# Altium PCB STM32WB55.PcbDoc
Units mm, origin at the board's own origin, x right, y up, seen from the top; angles counter-clockwise.
Board outline 51.82 x 28.33 mm, 4 copper layers (L1, L2, L3, L4), stack 1.586 mm thick; 54 components, 34 nets, 244 pads, 150 vias.
Unrouted connection lines stored in the file: 1.
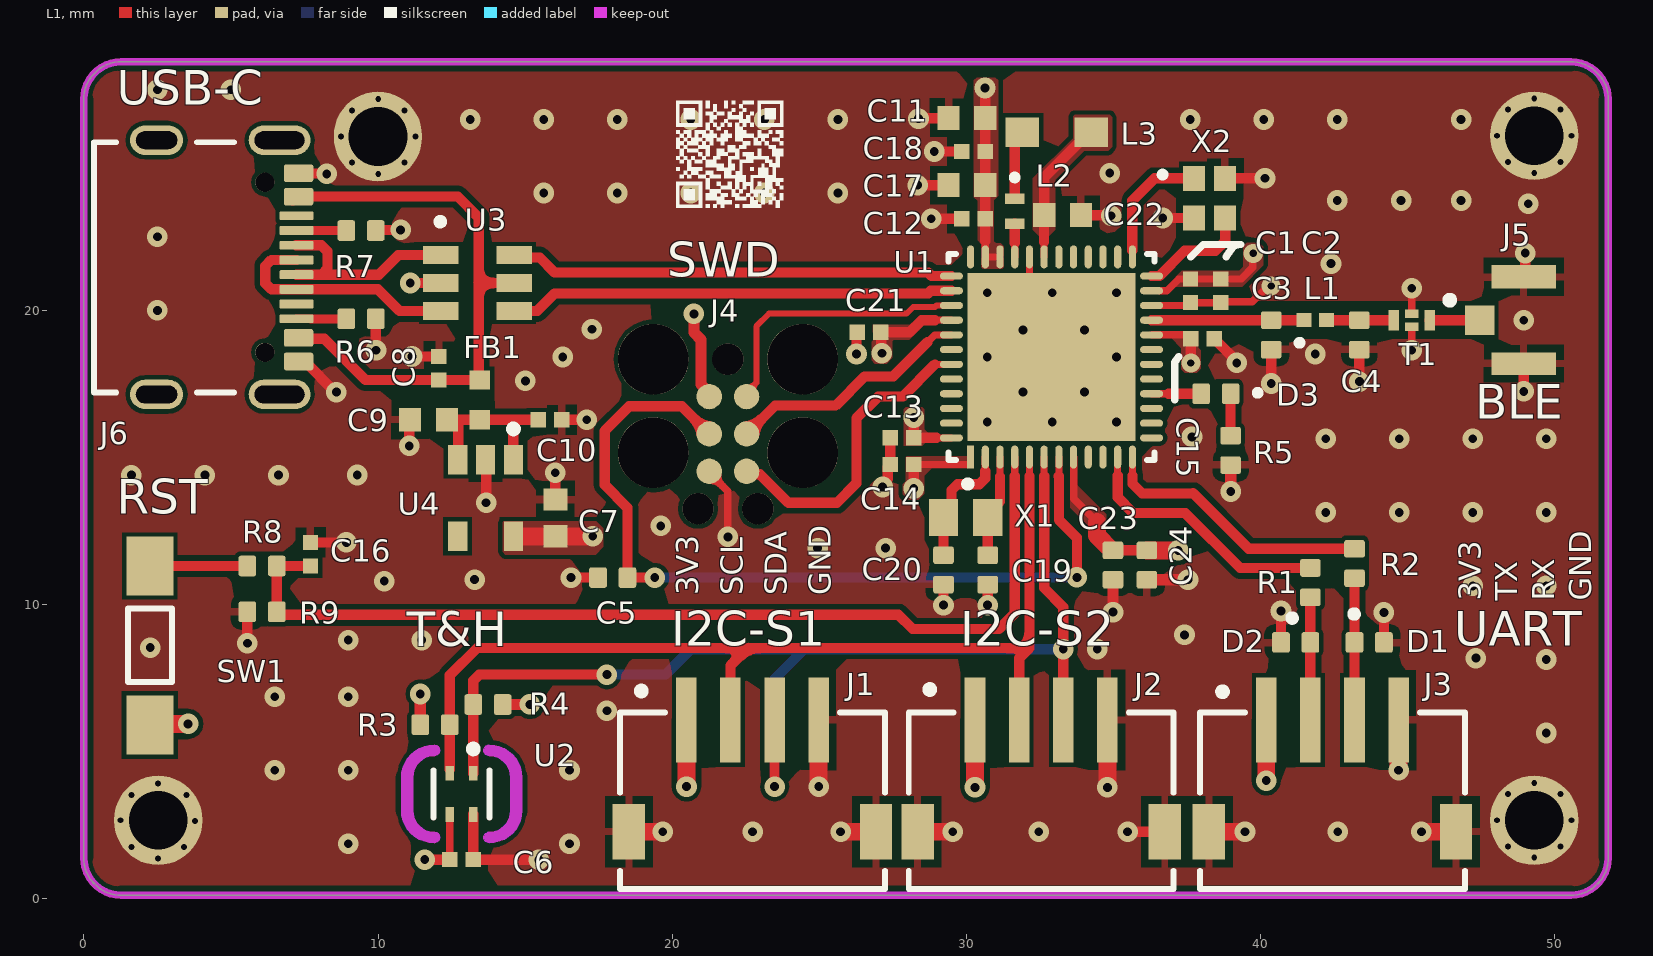
[diagram p0: L1 view]
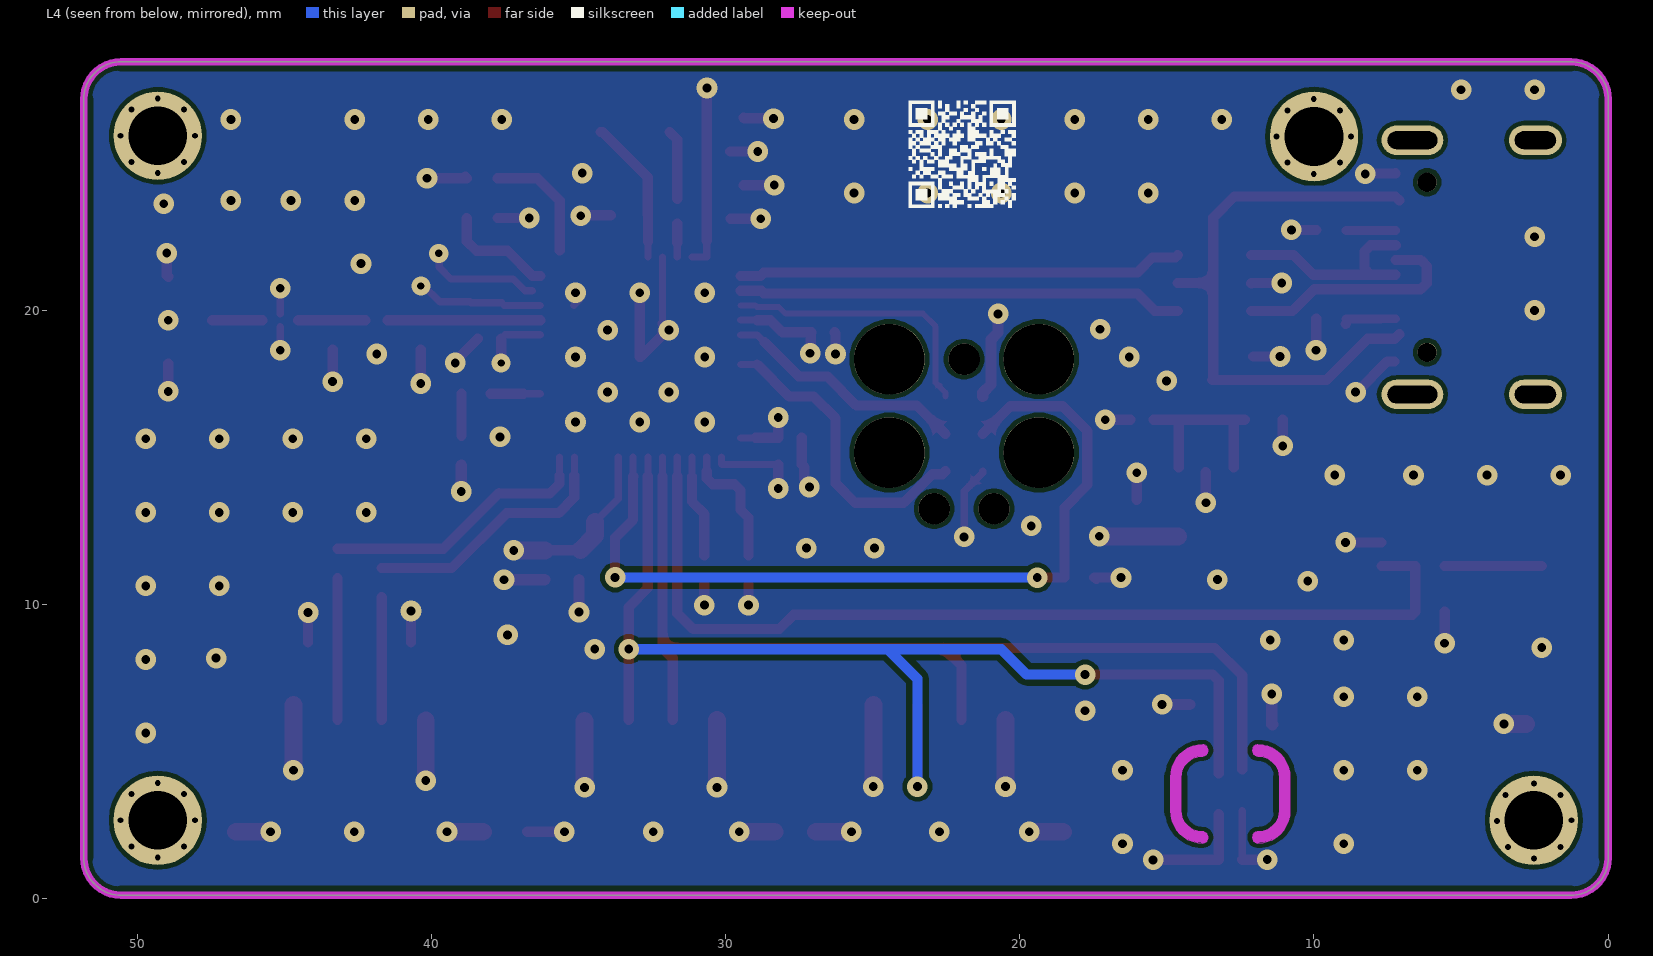
[diagram p1: L4 view, seen from below]
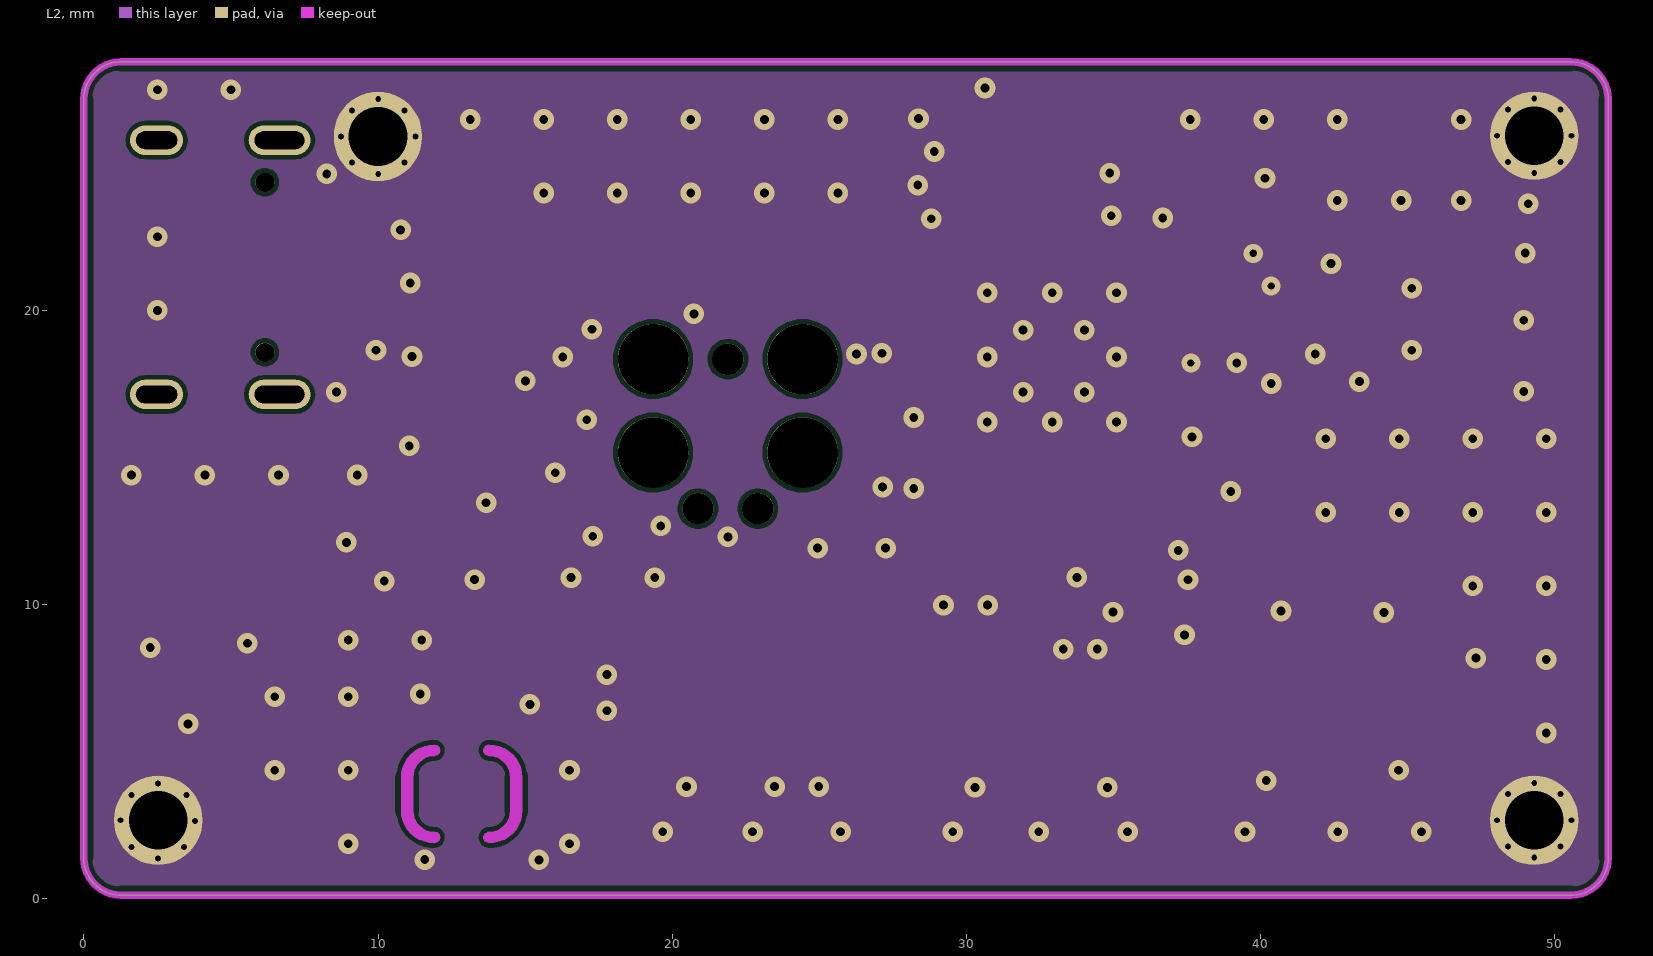
[diagram p2: L2]
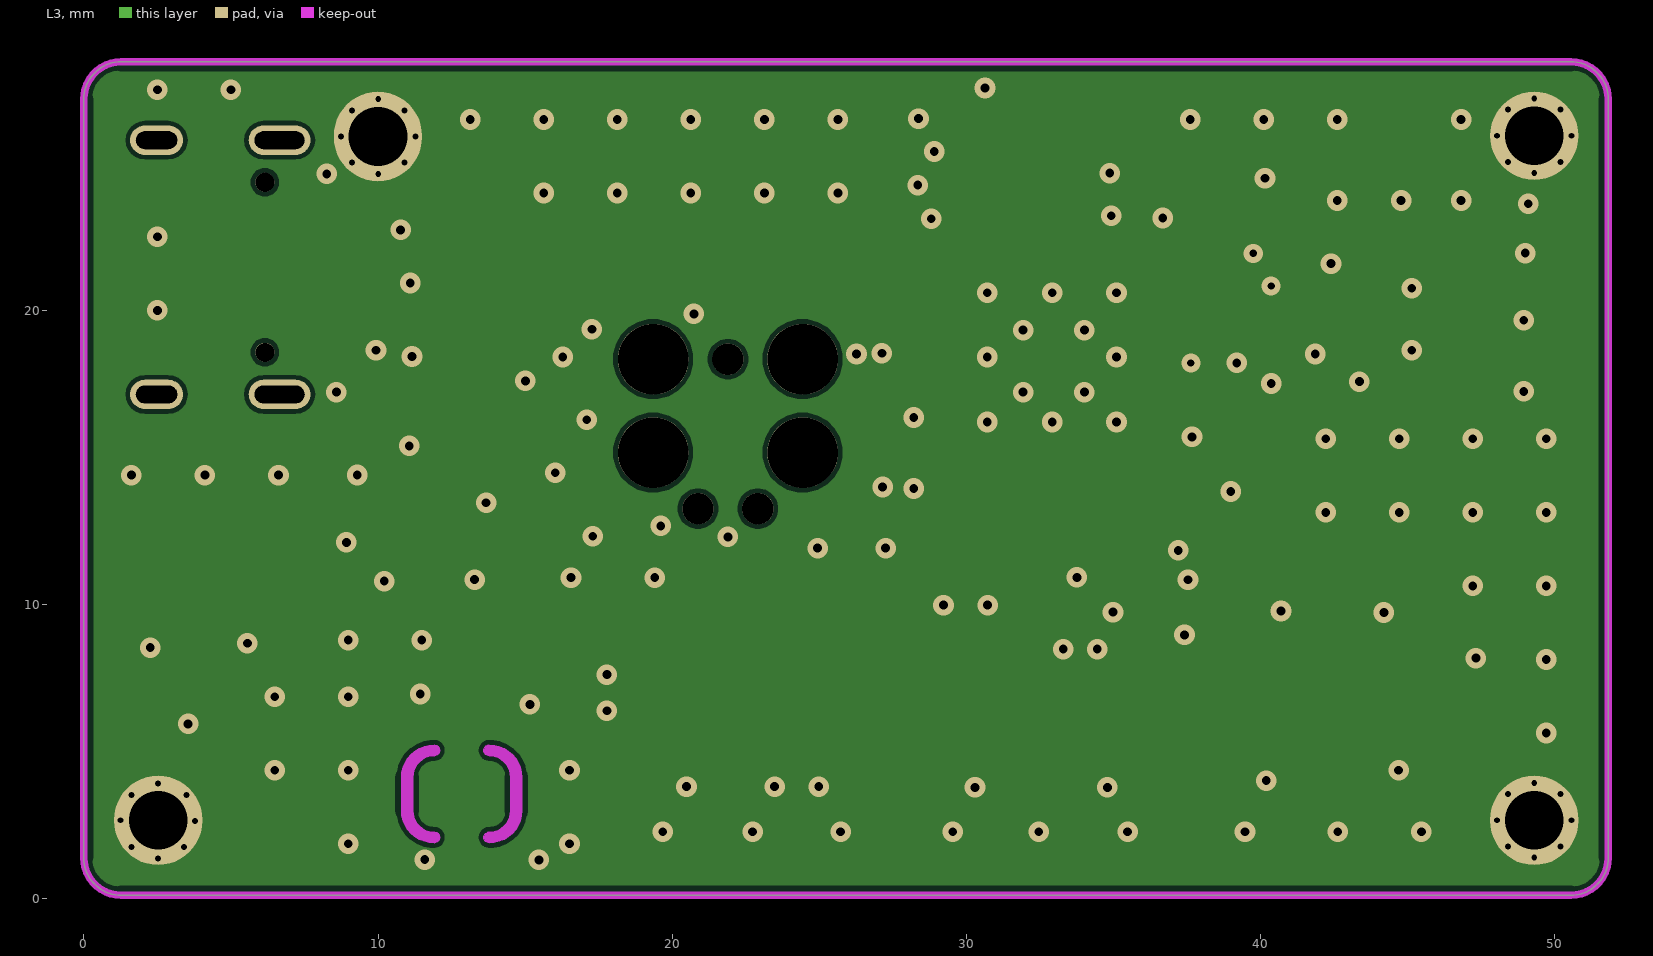
[diagram p3: L3]
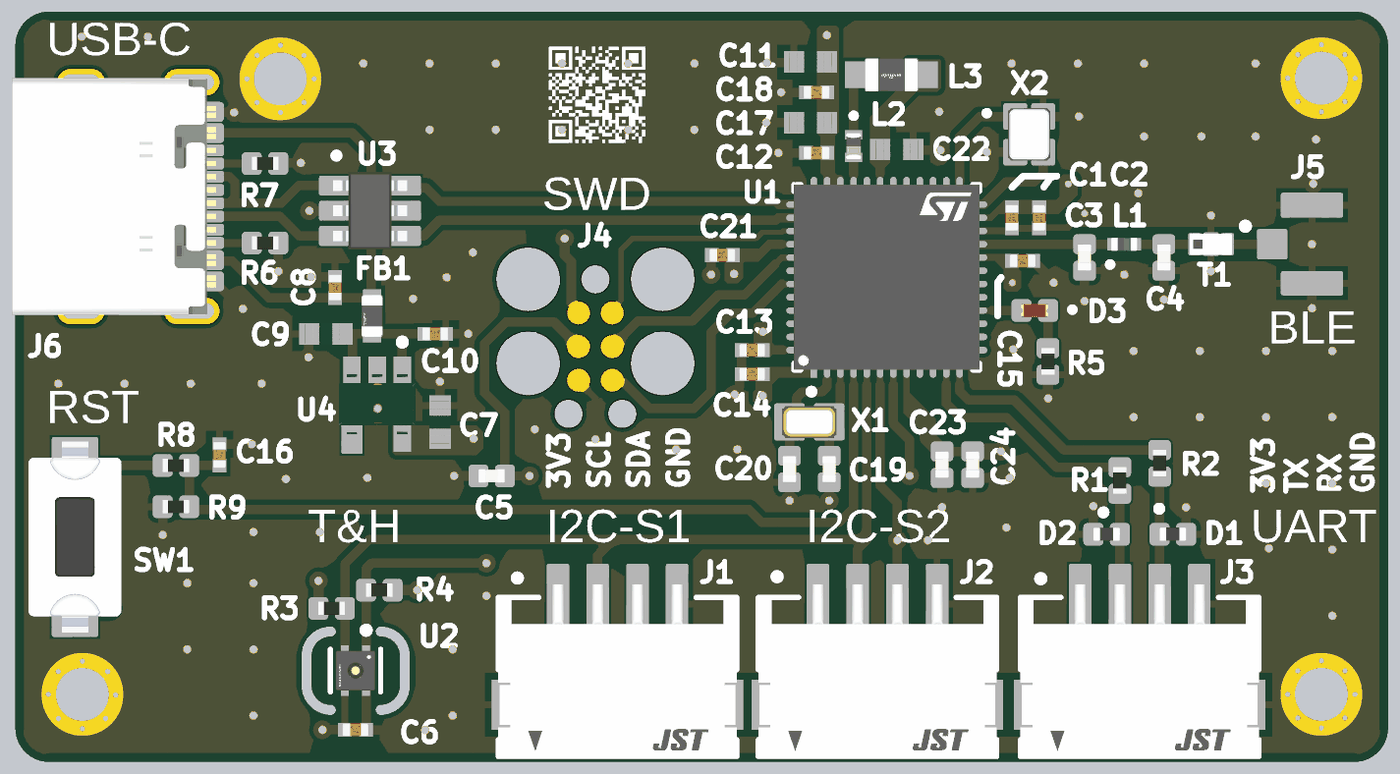
[diagram p4: 3D render of the assembled board from above, using the file's embedded part models]

## Layer stack, top to bottom
Top Solder: solder mask 0.0254, Solder Resist, Dk 3.5
L1: signal copper 0.035
PP1-7628: prepreg 0.2104, PP-022, Dk 4.5
L2: signal copper 0.0152
C-RF4: dielectric 1.065, FR-4, Dk 4.6
L3: signal copper 0.0152
PP2-7628: prepreg 0.2104, PP-022, Dk 4.5
L4: signal copper 0.035
Bottom Solder: solder mask 0.0254, Solder Resist, Dk 3.5

## Board outline
1.27,0.118 cw(c1.27,1.388) 0,1.388 0,27.178 cw(c1.27,27.178) 1.27,28.448 50.546,28.448 cw(c50.546,27.178) 51.816,27.178 51.816,1.388 cw(c50.546,1.388) 50.546,0.118
cut-out: 13.786,1.892 cw(c13.786,2.083) 13.786,2.274 ccw(c13.786,2.997) 14.509,2.997 14.509,4.127 ccw(c13.786,4.127) 13.786,4.85 cw(c13.786,5.041) 13.786,5.232 cw(c13.786,4.127) 14.891,4.128 14.891,2.997 cw(c13.786,2.997)
cut-out: 10.801,2.997 10.801,4.128 cw(c11.906,4.127) 11.906,5.232 cw(c11.906,5.041) 12.097,5.041 cw(c11.906,5.041) 11.906,4.85 ccw(c11.906,4.127) 11.182,4.127 11.182,2.997 ccw(c11.906,2.997) 11.906,2.274 cw(c11.906,2.083) 12.097,2.083 cw(c11.906,2.083) 11.906,1.892 cw(c11.906,2.997)

## Design rules (kind name [scope] priority, off if disabled: settings)
Clearance [All] p1: gap=0.15 ignorepadtopadclearanceinfootprint=FALSE except(0.2: Track-Poly)
DiffPairsRouting [All] p1: maxlimit=0.36 minlimit=0.127 mostfreqgap=0.36 toplayer_mingap=0.36 toplayer_minwidth=0.35 toplayer_maxwidth=0.35 toplayer_prefwidth=0.35 bottomlayer_mingap=0.36 bottomlayer_minwidth=0.35 bottomlayer_maxwidth=0.35 bottomlayer_prefwidth=0.35 impedanceprofiledriven=TRUE impedanceprofileid={4837A5BA-187C-47B3-9FB3-3A0B7BE3B15D} impedanceprofilevalue=90.000000 maxuncoupledlength=12.7
HoleToHoleClearance [All] p1: gap=0.15 allowstackedmicrovias=TRUE
MinimumSolderMaskSliver [All] p1: minsoldermaskwidth=0.1
PasteMaskExpansion [All] p1: expansion=0.076
PlaneConnect [All] p1: pad.planeconnectstyle=Direct pad.reliefexpansion=0.508 pad.reliefentries=4 pad.reliefconductorwidth=0.254 pad.reliefairgap=0.254 via.planeconnectstyle=Relief via.reliefexpansion=0.508 via.reliefentries=4 via.reliefconductorwidth=0.254 via.reliefairgap=0.254
PolygonConnect [All] p1: thpad.connectstyle=Relief thpad.reliefconductorwidth=0.254 thpad.reliefentries=4 thpad.polygonreliefangle="90 Angle" thpad.airgapwidth=0.254 smdpad.connectstyle=Relief smdpad.reliefconductorwidth=0.254 smdpad.reliefentries=4 smdpad.polygonreliefangle="90 Angle" smdpad.airgapwidth=0.254 via.connectstyle=Direct via.reliefconductorwidth=0.254 via.reliefentries=4 via.polygonreliefangle="90 Angle" via.airgapwidth=0.254
RoutingVias [All] p1: holewidth=0.3 width=0.7 viastyle="Through Hole" minholewidth=0.25 minwidth=0.65 maxholewidth=0.3 maxwidth=0.7
SolderMaskExpansion [All] p1: expansion=0.038 istentingtop=FALSE
Width Power [InNetClass('USB_Power')] p1: maxlimit=2.54 minlimit=0.2 preferedwidth=0.61 minimp=50.000000 maximp=50.000000 favimp=50.000000
Width [All] p2: maxlimit=0.35 minlimit=0.1 preferedwidth=0.35 midlayer1_minwidth=0.27 midlayer1_maxwidth=0.27 midlayer1_prefwidth=0.27 midlayer2_minwidth=0.27 midlayer2_maxwidth=0.27 midlayer2_prefwidth=0.27 bottomlayer_minwidth=0.35 impedanceprofiledriven=TRUE impedanceprofileid={0980600F-B7DE-4A01-A419-43350739EBA9} impedanceprofilevalue=50.000000 minimp=50.000000 maximp=50.000000 favimp=50.000000
25 further rules are at their usual default settings.

## Classes and differential pairs
net class USB_Power: 3V3 GND VDDUSB
differential pair DATA: +DATA_P -DATA_N

## Components (designator, comment, footprint, x,y, rotation, side; value= is the part's Value field where it differs from the comment)
C1 "C0402C104K8RAC" FP-C0402-BB-MFG 37.617,20.665 r270 top value=100nF
C2 "C0402C104K8RAC" FP-C0402-BB-MFG 38.648,20.665 r270 top value=100nF
C3 "GRM1555C2AR80BA01D" CAP_0402#1 40.361,19.165 r90 top
C4 "GRM1555C1HR30WA01D" CAP_0402#1 43.358,19.165 r90 top
C5 "C0402" CAP_0402#1 17.979,10.917 r0 top
C6 "C0402C104K8RAC" FP-C0402-BB-MFG 12.839,1.33 r0 top value=100nF
C7 "CL10A475KP8NNND" FP-CL10-IPC_C 16.027,12.946 r90 top
C8 "C0402C104K8RAC" FP-C0402-BB-MFG 12.065,18.031 r90 top value=100nF
C9 "CL10A475KP8NNND" FP-CL10-IPC_C 11.717,16.281 r180 top
C10 "C0402C104K8RAC" FP-C0402-BB-MFG 15.848,16.281 r0 top value=100nF
C11 "CL10A475KP8NNND" FP-CL10-IPC_C 30.016,26.543 r180 top
C12 "C0402C104K8RAC" FP-C0402-BB-MFG 30.243,23.114 r180 top value=100nF
C13 "C0402C104K8RAC" FP-C0402-BB-MFG 27.813,15.665 r180 top value=100nF
C14 "C0402C104K8RAC" FP-C0402-BB-MFG 27.813,14.76 r180 top value=100nF
C15 "C0402C104K8RAC" FP-C0402-BB-MFG 38.024,19.038 r0 top value=100nF
C16 "C0402C104K8RAC" FP-C0402-BB-MFG 7.706,11.711 r90 top value=100nF
C17 "CL10A475KP8NNND" FP-CL10-IPC_C 30.016,24.257 r180 top
C18 "C0402C104K8RAC" FP-C0402-BB-MFG 30.243,25.4 r180 top value=100nF
C19 "C0402" CAP_0402#2 30.722,11.176 r90 top
C20 "C0402" CAP_0402#2 29.222,11.176 r90 top
C21 "C0402C104K8RAC" FP-C0402-BB-MFG 26.689,19.253 r180 top value=100nF
C22 "CL10A475KP8NNND" FP-CL10-IPC_C 33.27,23.241 r0 top
C23 "C0402" CAP_0402#1 34.982,11.342 r90 top
C24 "C0402" CAP_0402#1 36.137,11.342 r90 top
D1 "D_TVS_0402" D_0402 43.693,8.712 r180 top locked
D2 "D_TVS_0402" D_0402 41.193,8.712 r0 top
D3 "RED" LED_0402_RED 38.481,17.165 r0 top
FB1 "BLM18EG101TN1D" FP-BLM18-0_15-t0_5-MFG 13.463,16.956 r270 top
J1 "S4B-ZR-SM4A-TF(LF)(SN)" FP-S4B-ZR-SM4A-TF_LF_SN-MFG 22.729,3.327 r180 top
J2 "S4B-ZR-SM4A-TF(LF)(SN)" FP-S4B-ZR-SM4A-TF_LF_SN-MFG 32.543,3.327 r180 top
J3 "S4B-ZR-SM4A-TF(LF)(SN)" FP-S4B-ZR-SM4A-TF_LF_SN-MFG 42.443,3.327 r180 top
J4 "TC2030" TC2030-FP 21.895,15.799 r270 top
J5 "73412-0110" MOLX-73412-0110_V 48.946,19.665 r270 top
J6 "USB4105-GF-A-060" USB4105-GF-A-060 4.851,21.463 r270 top
L1 "LQG15HS2N7S02D" FP-LQG15HH_02-IPC_C 41.859,19.665 r0 top
L2 "LQG15WZ10NJ02D" FP-LQG15WH_02-MFG 31.643,23.368 r270 top
L3 "LQM21FN100M70L" FP-LQM21FN_70-MFG 33.072,26.06 r180 top
R1 "220ohm" RES_0402#1 41.693,10.744 r270 top
R2 "220ohm" RES_0402#1 43.193,11.394 r270 top
R3 "10K" RES_0402#2 11.939,5.917 r180 top
R4 "10K" RES_0402#2 13.739,6.602 r0 top
R5 "220ohm" RES_0402#1 38.981,15.24 r270 top
R6 "R0402" RES_0402#1 9.423,19.71 r0 top
R7 "5K1" RES_0402#1 9.423,22.713 r0 top
R8 "R0402" RES_0402#1 6.059,11.311 r0 top
R9 "5k1" RES_0402#1 6.059,9.754 r0 top
SW1 "DTSM-3" DTSM-3 2.247,8.611 r270 top
T1 "DLF162500LT-5028A1" DLF162500LT5028A1 45.136,19.665 r0 top
U1 "STM32WB55CGU6" FP-STM32WB55CGU6-IPC_B 32.893,18.415 r90 top
U2 "SHT40-AD1B-R2" FP-SHT40-AD1B-R2-MFG 12.839,3.566 r270 top
U3 "USBLC6-2SC6" SOT95P280X145-6N 13.386,20.93 r0 top
U4 "MIC5504-3.3YM5-TR" FP-SOT23-5LD-PL-1-MFG 13.655,13.619 r270 top
X1 "NX2012SA-32.768K-STD-MUB-1" XTAL_NX2012SA-32.768K-STD-MUB-1 29.972,12.954 r180 top value="32.768 kHz"
X2 "NX2016SA-32MHZ-EXS00A-CS10820" OSC_NX2016SA-24MHZ-EXS00A-CS10820 38.269,23.814 r0 top

## Footprints (in the part's own frame and the unit in brackets; to place one, negate y for a bottom-side part, rotate by r counter-clockwise, add the part's x,y. Pads: shape width x height; smd on the part's side, far side on the other; paste and mask are expansions set on the pad)
CAP_0402#1 [mm]
  rrect25% 0.6x0.7 smd: 1(-0.5,0) 2(0.5,0)
  body extent -0.5,-0.26 0.5,0.26, height 0.37
CAP_0402#2 [mm]
  rrect25% 0.6x0.7 smd mask+0.025: 1(-0.5,0) 2(0.5,0)
  body extent -0.5,-0.26 0.5,0.26, height 0.37
D_0402 [mm]
  rrect25% 0.6x0.7 smd: A(-0.5,0) K(0.5,0)
  body extent -0.5,-0.25 0.5,0.25, height 0.51
DLF162500LT5028A1 [mm]
  rect 0.35x0.7 smd mask+0.025: 1(-0.612,0) 3(0.613,0)
  rect 0.45x0.29 smd mask+0.025: 2(0,-0.227) 4(0,0.227)
  body extent -0.8,-0.4 0.8,0.4, height 0.4
DTSM-3 [mm]
  rect 2x1.6 smd: 1(-2.7,0) 2(2.7,0)
  silkscreen extent -1.25,-0.75 1.25,0.75, body extent -3.6,-1.75 3.6,1.75, height 4.96
FP-BLM18-0_15-t0_5-MFG [mm]
  rect 0.65x0.7 smd paste+0 mask+0: 1(-0.675,0) 2(0.675,0)
  body extent -1.1,-0.58 1.1,0.58, height 0.25
FP-C0402-BB-MFG [mm]
  rect 0.52x0.52 smd paste+0 mask+0: 1(-0.4,0) 2(0.4,0)
  body extent -0.8,-0.4 0.8,0.4, height 0.25
FP-CL10-IPC_C [mm]
  rect 0.758x0.812 smd paste+0 mask+0: 1(-0.627,0) 2(0.627,0)
  body extent -1.11,-0.55 1.11,0.55, height 0.25
FP-LQG15HH_02-IPC_C [mm]
  rect 0.515x0.472 smd paste+0 mask+0: 1(-0.379,0) 2(0.379,0)
  silkscreen extent -0.61,-0.84 -0.46,-0.69, body extent -0.74,-0.38 0.74,0.38, height 0.25
FP-LQG15WH_02-MFG [mm]
  rect 0.35x0.65 smd paste+0 mask+0: 1(-0.425,0) 2(0.425,0)
  silkscreen extent -1.25,-0.1 -1.05,0.1, body extent -0.7,-0.43 0.7,0.43, height 0.25
FP-LQM21FN_70-MFG [mm]
  rect 1.15x1 smd paste+0 mask+0: 1(-1.175,0) 2(1.175,0)
  body extent -1.85,-0.82 1.85,0.82, height 0.25
FP-S4B-ZR-SM4A-TF_LF_SN-MFG [mm]
  rect 0.7x2.9 smd: 1(2.25,-2.75) 2(0.75,-2.75) 3(-0.75,-2.75) 4(-2.25,-2.75)
  rect 1.1x1.9 smd paste+0 mask+0: 5(-4.2,1.05) 6(4.2,1.05)
  silkscreen extent -4.5,-3.86 4.5,3, body extent -4.85,-4.3 4.85,3.1, height 0.25
FP-SHT40-AD1B-R2-MFG [mm]
  rect 0.5x0.3 smd paste+0 mask+0: 1(-0.7,0.4) 2(-0.7,-0.4) 3(0.7,-0.4) 4(0.7,0.4)
  silkscreen extent -1.65,-0.95 0.8,0.95, body extent -1.05,-0.9 1.05,0.9, height 0.25
FP-SOT23-5LD-PL-1-MFG [mm]
  rect 1x0.66 smd paste+0 mask+0: 1(-1.3,0.95) 2(-1.3,0) 3(-1.3,-0.95) 5(1.3,0.95)
  rect 1x0.66 smd mask+0: 4(1.3,-0.95)
  silkscreen extent -2.47,0.83 -2.23,1.08, body extent -1.9,-1.6 1.9,1.6, height 0.25
FP-STM32WB55CGU6-IPC_B [mm]
  rect 0.783x0.242 smd paste+0 mask+0: 1(-3.401,2.75)
  rrect100% 0.783x0.242 smd paste+0 mask+0: 2(-3.401,2.25) 3(-3.401,1.75) 4(-3.401,1.25) 5(-3.401,0.75) 6(-3.401,0.25) 7(-3.401,-0.25) 8(-3.401,-0.75) 9(-3.401,-1.25) 10(-3.401,-1.75) 11(-3.401,-2.25) 12(-3.401,-2.75) 25(3.401,-2.75) 26(3.401,-2.25) 27(3.401,-1.75) 28(3.401,-1.25) 29(3.401,-0.75) 30(3.401,-0.25) 31(3.401,0.25) 32(3.401,0.75) 33(3.401,1.25) 34(3.401,1.75) 35(3.401,2.25) 36(3.401,2.75)
  rrect100% 0.242x0.783 smd paste+0 mask+0: 13(-2.75,-3.401) 14(-2.25,-3.401) 15(-1.75,-3.401) 16(-1.25,-3.401) 17(-0.75,-3.401) 18(-0.25,-3.401) 19(0.25,-3.401) 20(0.75,-3.401) 21(1.25,-3.401) 22(1.75,-3.401) 23(2.25,-3.401) 24(2.75,-3.401) 37(2.75,3.401) 38(2.25,3.401) 39(1.75,3.401) 40(1.25,3.401) 41(0.75,3.401) 42(0.25,3.401) 43(-0.25,3.401) 44(-0.75,3.401) 45(-1.25,3.401) 46(-1.75,3.401) 47(-2.25,3.401) 48(-2.75,3.401)
  rect 5.7x5.7 smd paste-1000 mask+0: 49(0,0)
  silkscreen extent -4.42,-3.5 3.5,3.5, body extent -4.11,-4.11 4.11,4.11, height 0.25
LED_0402_RED [mm]
  rrect25% 0.6x0.7 smd: A(-0.5,0) K(0.5,0)
  body extent -0.51,-0.25 0.51,0.25, height 0.45
MOLX-73412-0110_V [mm] "MCRF, 4-Leads, Body 2.6x2.6mm"
  rect 1x1 smd: 1(0,-1.5)
  rect 0.796x2.2 smd: 2(-1.475,0)
  rect 0.771x2.2 smd: 4(1.475,0)
  silkscreen extent -0.81,-2.64 -0.56,-2.39, body extent -1.3,-1.3 1.3,1.3, height 1.3
OSC_NX2016SA-24MHZ-EXS00A-CS10820 [mm]
  rect 0.75x0.85 smd mask+0.025: 1(-0.525,0.675) 2(-0.525,-0.675) 3(0.525,-0.675) 4(0.525,0.675)
  silkscreen extent -1.7,0.7 -1.5,0.9, body extent -0.8,-1 0.8,1, height 0.5
RES_0402#1 [mm]
  rrect25% 0.6x0.7 smd: 1(-0.5,0) 2(0.5,0)
  body extent -0.5,-0.25 0.5,0.25, height 0.3
RES_0402#2 [mm]
  rrect25% 0.6x0.7 smd mask+0.025: 1(-0.5,0) 2(0.5,0)
  body extent -0.5,-0.25 0.5,0.25, height 0.3
SOT95P280X145-6N [mm]
  rect 1.2x0.6 smd mask+0.025: 1(-1.25,0.95) 2(-1.25,0) 3(-1.25,-0.95) 4(1.25,-0.95) 5(1.25,0) 6(1.25,0.95)
  body extent -1.4,-1.46 1.4,1.46, height 1.45
TC2030-FP [mm]
  round 0.863 smd paste-0.432: 1(-1.27,-0.635) 2(-1.27,0.635) 3(0,-0.635) 4(0,0.635) 5(1.27,-0.635) 6(1.27,0.635)
  round 2.4 hole 2.4 unplated: MH(-2.54,2.54) MH(-2.54,-2.54) MH(0.635,2.54) MH(0.635,-2.54)
  round 1.067 hole 1.067 unplated: MH(-2.54,0) MH(2.54,1.016) MH(2.54,-1.016)
USB4105-GF-A-060 [mm]
  rrect25% 0.6x1 smd mask+0.025: A1B12(-3.2,2.449) A4B9(-2.4,2.449) B1A12(3.2,2.449) B4A9(2.4,2.449)
  rrect25% 0.3x1.15 smd mask+0.025: A5(-1.25,2.378) A6(-0.25,2.378) A7(0.25,2.378) A8(1.25,2.378) B5(1.75,2.378) B6(0.75,2.378) B7(-0.75,2.378) B8(-1.75,2.378)
  round 0.65 hole 0.65 unplated mask+0.05: MH(-2.89,1.303) MH(2.89,1.303)
  oval 1x2.1 hole 0.6 slot 1.7 at 90 deg: SH(-4.32,1.803) SH(4.32,1.803)
  oval 1x1.8 hole 0.6 slot 1.4 at 90 deg: SH(-4.32,-2.377) SH(4.32,-2.377)
  silkscreen extent -4.25,-4.5 4.25,0.25, body extent -4.47,-4.97 4.47,2.73, height 3.27
XTAL_NX2012SA-32.768K-STD-MUB-1 [mm]
  rect 1x1.25 smd mask+0.025: 1(-0.75,0) 2(0.75,0)
  body extent -1.02,-0.6 1.02,0.6, height 0.6

## Part data
C1 C2 C6 C8 C10 C12 C13 C14 C15 C16 C18 C21: library part CMP-03020-004693-2, "C0402 0.10 μF X7R 10.00% 10 V", Capacitance=100nF, Manufacturer=Kemet, Package=C0402-BB, Temperature="-55°C to +125°C", Temperature Characteristic=X7R, Temperature Coefficient=15%, Temperature Range High=+125°C, Temperature Range Low=-55°C, Tolerance=0.1, Voltage Rating="10 V", Automotive=No, Category=Cap, ComponentLink2Description=Datasheet, ComponentLink2URL=https://content.kemet.com/datasheets/KEM_C1002_X7R_SMD.pdf, Device Class L1="Passive Components", Device Class L2=Capacitors, Device Class L3="Ceramic Capacitors", Height=0.55mm, Ipc Land Pattern Name=CAPC10050X50, Lead Free=Yes, Manufacturer Part Number=C0402C104K8RAC, Material=Ceramic, Mouser Description="Cap Ceramic 0.1uF 10V X7R 10% Pad SMD 0402 125C Bulk", Octopart=https://octopart.com/c0402c104k8rac-kemet-2610564, RoHS=TRUE
C3: library part CAP_0402, "0.8 pF ±0.1pF 100V Ceramic Capacitor C0G, NP0 0402 (1005 Metric", Manufacturer="Murata Electronics", Rating=0.8pF, Distributor Link=https://www.murata.com/en-global/products/productdetail?partno=GRM1555C1HR30WA01%23, Manufacturer Part Number=GRM1555C2AR80BA01D
C4: library part CAP_0402, "Multilayer Ceramic Capacitors MLCC - SMD/SMT 0.3 pF 50 VDC 0.05 pF 0402 C0G (NP0)", Manufacturer="Murata Electronics", Rating=0.3pF, Distributor Link=https://www.murata.com/en-global/products/productdetail?partno=GRM1555C1HR30WA01%23, Manufacturer Part Number=GRM1555C1HR30WA01D
C5: library part CAP_0402, "Capacitor SMD 0402", Rating=100nF
C7 C9 C11 C17 C22: library part CMP-13271-003065-1, "Cap Ceramic 4.7uF 10V X5R ±10% Pad SMD 0603 +85°C T/R", Capacitance=4.7uF, Case/Package=0603, Dielectric=X5R, Max Operating Temperature=85°C, Min Operating Temperature=-55°C, Package Quantity=10000, Tolerance=10%, Voltage Rating=10V, Depth=0.8mm, Height=0.8mm, Length=1.6mm, Mount="Surface Mount", Packaging="Tape and Reel", Radiation Hardening=No, Thickness=0.035inch, Voltage Rating (DC)=10V, Width=0.031inch
C19 C20: library part CAP_0402, "Capacitor SMD 0402", Rating=10pF
C23: library part CAP_0402, "Capacitor SMD 0402", Rating=1uF
C24: library part CAP_0402, "Capacitor SMD 0402", Rating=10nF
D1 D2: "Diode TVS / ESD 0402"
D3: library part LED_0402_RED, "LED 0402 RED SMD"
FB1: library part CMP-0686-00530-3, "Chip Ferrite Bead, 0603, 100Ω @ 100MHz, 25%, 0.045Ω, 2A", Case Code (Imperial)=0603, Case Code (Metric)=1608, Current Rating=2A, DC Resistance (DCR)=45mR, Max Operating Temperature=125°C, Min Operating Temperature=-55°C, Package Quantity=1, Test Frequency=100MHz, Tolerance=25%, Case/Package=0603, Contact Plating=Tin, Core Material=Ferrite, Depth=0.8mm, Height=0.8mm, Impedance=100R, Lead Free="Lead Free", Length=1.6mm, Material=Ferrite, Max Current Rating=2A, Max DC Current=2A, Number Of Circuits=1, Number of Lines=1, Number of Pins=2, Packaging="Tape and Reel", REACH SVHC="No SVHC", Termination=SMD/SMT, Width=0.8mm
J1 J2 J3: library part CMP-17439-000081-1, "CONN HEADER SMD R/A 4POS 1.5MM", Color=Natural, Contact Resistance=30mR, Current Rating=1A, Flammability Rating="UL94 V-0", Housing Color=Beige, Max Operating Temperature=85°C, Max Voltage Rating (AC)=50V, Min Operating Temperature=-25°C, Connector Type=Header, Contact Finish - Mating=TIN, Contact Material=Brass, Contact Plating=Copper, Contact Shape=Circular, Contact Type="Male Pin", Depth=6.5mm, Fastening Type=Detent, Gender=Male, Height=7.2mm, Housing Material=Polyamide, Insulation Color=Natural, Insulation Material=Nylon, Lead Free="Lead Free", Length=9mm, Max Current Rating=1A, Max Voltage Rating (DC)=50V, Mount="Surface Mount", Number of Contacts=4, Number of Positions=4, Number of Rows=1, Orientation="Right Angle", Packaging="Tape and Reel", Pitch=1.5mm, Series=ZH, Termination=Solder, Voltage Rating=50V, Width=3.5mm
J4: "Tag-Connect No-Solder SWD Debug Connector DO NOT PLACE", Manufacturer=Tag-Connect, Manufacturer Part Number=TC2030
J5: library part CMP-1676-00003-1, "MCRF, PCB Vertical Jack Receptacle, 50 Ohm, 4-Pin SMD, RoHS, Tape and Reel", Frequency="6 Hz", Max Operating Temperature="90 degC", Min Operating Temperature="-40 degC", Package Quantity=5000, Voltage Rating="60 V", ComponentLink1Description="Manufacturer URL", ComponentLink1URL=http://www.molex.com/, ComponentLink2Description=Datasheet, ComponentLink2URL=http://www.molex.com/webdocs/datasheets/pdf/en-us/0734120110_RF_COAX_CONNECTORS.pdf, ComponentLink3Description="Package Specification", ComponentLink3URL=http://www.molex.com/pdm_docs/sd/734120110_sd.pdf, Contact Material=Bronze, Contact Plating=Gold, DatasheetVersion=04/2016, Gender=Female, Height="1.25 mm", Impedance="50 Ohm", Length="3 mm", Mating Cycles=30, Mount="Surface Mount", Mounting Technology="Surface Mount", PackageDescription="4-Leads SMD, Body 2.6 x 2.6 mm", PackageReference=73412-0110, PackageVersion="Rev. C14, 07/2015", Packaging="Tape and Reel", Radiation Hardening=No, REACH SVHC=Unknown, RoHSCompliant=true, Voltage Rating (AC)="60 V", Width="3 mm"
J6: "USB Connector Type C SMT 12 Pin", Manufacturer=GCT, Distributor Link=https://eu.mouser.com/ProductDetail/GCT/USB4105-GF-A-060?qs=QNEnbhJQKvY2mocwNJzgfA%3D%3D, Manufacturer Part Number=USB4105-GF-A-060
L1: library part CMP-2000-06580-2, "Multilayer type RF Inductor 2.7nH ±0.3nH 0.12Ω 800mA 0402", Case Code (Imperial)=0402, Case Code (Metric)=1005, Current Rating=300mA, DC Resistance (DCR)=150mR, Inductance=2.7nH, Max Operating Temperature=125°C, Min Operating Temperature=-55°C, Package Quantity=10000, Self Resonant Frequency=6GHz, Test Frequency=100MHz, Case/Package=0402, Core Material=Air, DC Current=300mA, Depth=0.55mm, Height=0.5mm, Height - Seated (Max)=0.022inch, Lead Free="Lead Free", Length=1mm, Max DC Current=300mA, Military Standard=Not, Mount="Surface Mount", Packaging="Tape and Reel", Q Factor=8, Radiation Hardening=No, Shielding=Unshielded, Termination=SMD/SMT, Width=0.5mm
L2: library part CMP-06042-005237-1, "Multilayer type Inductor for Automotive 10nH ±5% 0.19Ω 500mA 0402", Case Code (Imperial)=0402, Case Code (Metric)=1005, Current Rating=500mA, DC Resistance (DCR)=190mR, Inductance=10nH, Max Operating Temperature=125°C, Min Operating Temperature=-55°C, Ratings=AEC-Q200, Self Resonant Frequency=3.3GHz, Test Frequency=100MHz, Tolerance=5%, Case/Package=0402, Core Material=Air, Mount="Surface Mount", Packaging="Cut Tape", Shielding=Unshielded
L3: library part CMP-2000-06587-2, "FIXED IND 10UH 100MA 780MOHM SMD", Case Code (Imperial)=0805, Case Code (Metric)=2012, Current Rating=100mA, DC Resistance (DCR)=780mR, Inductance=10uH, Max Operating Temperature=125°C, Min Operating Temperature=-55°C, Package Quantity=3000, Self Resonant Frequency=15MHz, Test Frequency=1MHz, Tolerance=20%, Case/Package=0805, Core Material=Ferrite, DC Current=100mA, Depth=1.45mm, Height=1.45mm, Height - Seated (Max)=0.057inch, Lead Free="Lead Free", Length=2.2mm, Max DC Current=100mA, Military Standard=Not, Mount="Surface Mount", Packaging="Tape and Reel", Radiation Hardening=No, Rated Current-Max=100mA, RoHS Compliant=Yes, Saturation Current=100mA, Series=LQM21F_70, Shielding=Shielded, Termination=SMD/SMT, Width=0.049inch
R1 R2 R3 R4 R5 R6 R7 R8 R9: library part RES_0402, "Resistor SMD 0402"
  R6: Parameter 1=5K1
  R8: Parameter 1=100Ohm
SW1: "Tactile Switch SMD SPST", Manufacturer=Diptronics, Manufacturer Part Number=DTSM-3
T1: "Filter", Manufacturer_Name=TDK, Mouser Part Number=810-DLF16250LT5028A1, Arrow Part Number=DLF162500LT-5028A1, Arrow Price/Stock=https://www.arrow.com/en/products/dlf162500lt-5028a1/tdk?region=europe, Datasheet Link=https://product.tdk.com/system/files/dam/doc/product/rf/rf/filter/catalog/rf_lpf_dlf162500lt-5028a1_en.pdf, Height=0.4mm, Manufacturer_Part_Number=DLF162500LT-5028A1, Mouser Price/Stock=https://www.mouser.co.uk/ProductDetail/TDK/DLF162500LT-5028A1?qs=U%2FZX79kHR%2FlwIbAISCs3qA%3D%3D
U1: library part CMP-12105-000013-1, "ULTRA-LOW-POWER DUAL CORE ARM CO", Ambient Temperature Range High=+85°C, Ambient Temperature Range Low=-40°C, Frequency=64MHz, Manufacturer=STMicroelectronics, Max Junction Temp=+105°C, Max Supply Voltage=3.6V, Min Supply Voltage=1.71V, Package=UFQFPN48, Temperature="-40°C to +105°C", Automotive=No, Category=IC, ComponentLink2Description=Datasheet, ComponentLink2URL=https://www.st.com/resource/en/datasheet/stm32wb55cg.pdf, Core Architecture="ARM Cortex-M4", Data Bus Width=32bits, Device Class L1="Integrated Circuits (ICs)", Device Class L2="Embedded Processors and Controllers", Device Class L3=Microcontrollers, Digikey Description="ULTRA-LOW-POWER DUAL CORE ARM CO", Height=0.65mm, Interface=I2C,SPI,UART,USART,2-Wire,USB,IrDA,Other, Lead Free=Yes, Manufacturer Part Number=STM32WB55CGU6, Memory Size=1MBytes, Memory Type=FLASH, Number Of A/D Converters=1, Number Of Adc Channels=13, Number Of Cores=1, Number Of I2C Channels=2, Number Of I/Os=30, Number Of Pwm Channels=14, Number Of Spi Channels=1, Number Of Timers/Counters=6, Number Of Uart Channels=2, Number Of Usb Channels=1, Octopart=https://octopart.com/stm32wb55cgu6-stmicroelectronics-98750847, Ram Size=256KBytes, RoHS=TRUE, Standoff Height=0mm, Temperature Range High=+105°C, Temperature Range Low=-40°C
U2: library part CMP-144040-000008-1, "SENSOR HUMIDITY 100 RH SMD"
U3: "Integrated Circuit", Manufacturer_Name=STMicroelectronics, Mouser Part Number=511-USBLC6-2SC6, Arrow Part Number=USBLC6-2SC6, Arrow Price/Stock=https://www.arrow.com/en/products/usblc6-2sc6/stmicroelectronics?utm_currency=USD&region=europe, Datasheet Link=http://www.st.com/st-web-ui/static/active/en/resource/technical/document/datasheet/CD00050750.pdf, Height=1.45mm, Manufacturer_Part_Number=USBLC6-2SC6, Mouser Price/Stock=https://www.mouser.co.uk/ProductDetail/STMicroelectronics/USBLC6-2SC6?qs=po45yt2pPpu%2FhNIlwQdTlg%3D%3D
U4: library part CMP-2000-07604-2, "IC REG LINEAR 3.3V 300MA SOT23-5", Case/Package=SOT-23-5, Dropout Voltage=380mV, Max Input Voltage=5.5V, Max Operating Temperature=125°C, Max Output Current=300mA, Min Input Voltage=2.5V, Min Operating Temperature=-40°C, Nominal Output Voltage=3.3V, Operating Supply Current=42uA, Power Supply Rejection Ratio (PSRR)=60dB, Quiescent Current=38uA, Accuracy=3%, Height=1.1mm, Length=2.9mm, Mount="Surface Mount", Number of Outputs=1, Number of Pins=5, Output Current=300mA, Output Type=Fixed, Output Voltage=3.3V, Packaging="Tape and Reel", REACH SVHC="No SVHC", Width=1.6mm
X1: "32.768 kHz Â±20ppm Crystal 12.5pF 80 kOhms 2-SMD, No Lead", Package="SMD-2 NDK", Availability="In Stock", Check_prices=https://www.snapeda.com/parts/NX2012SA-32.768K-STD-MUB-1/NDK+America%252C+Inc./view-part/?ref=eda, MF="NDK America,", MP=NX2012SA-32.768K-STD-MUB-1, Price=None, Purchase-URL=https://pricing.snapeda.com/search/part/NX2012SA-32.768K-STD-MUB-1/?ref=eda, SnapEDA_Link=https://www.snapeda.com/parts/NX2012SA-32.768K-STD-MUB-1/NDK+America%252C+Inc./view-part/?ref=snap
X2: library part NX2016SA-24MHZ-EXS00A-CS10820, "24 MHz - Crystal 6pF 80 Ohms 4-SMD, No Lead", Package="SMD-4 NDK America,", Check_prices=https://www.snapeda.com/parts/NX2016SA-24MHZ-EXS00A-CS10820/NDK+America%252C+Inc./view-part/?ref=eda, Digi-Key_Part_Number=644-1365-2-ND, MF="NDK America, Inc.", MP=NX2016SA-24MHZ-EXS00A-CS10820, Purchase-URL=https://pricing.snapeda.com/search/part/NX2016SA-24MHZ-EXS00A-CS10820/?ref=eda, SnapEDA_Link=https://www.snapeda.com/parts/NX2016SA-24MHZ-EXS00A-CS10820/NDK+America%252C+Inc./view-part/?ref=snap

## Free pads (board coordinates)
  round 0 hole 0.2 paste+0 mask+0: 0(1.245,2.667) 0(1.616,3.526) 0(1.626,1.753) 0(2.528,1.372) 0(2.528,3.921) 0(3.404,1.753) 0(3.485,3.527) 0(3.785,2.642) 0(8.738,25.908) 0(9.119,25.019) 0(9.119,26.797) 0(10.008,24.638) 0(10.008,27.178) 0(10.897,25.019) 0(10.897,26.797) 0(11.278,25.908) 0(48.031,2.667) 0(48.031,25.933) 0(48.412,1.778) 0(48.412,3.556) 0(48.412,25.044) 0(48.412,26.822) 0(49.301,1.397) 0(49.301,3.937) 0(49.301,24.663) 0(49.301,27.203) 0(50.19,1.778) 0(50.19,3.556) 0(50.19,25.044) 0(50.19,26.822) 0(50.571,2.667) 0(50.571,25.933)
  oval 3x3.048 hole 2: 0(2.528,2.667) 1(10,25.91) 1(49.301,2.667)
  round 3 hole 2: 1(49.301,25.934)

## Via types
v1: diameter 0.7, hole 0.3, L1 to L4, tented both sides, 147 vias
v2: diameter 0.65, hole 0.25, L1 to L4, tented both sides, 3 vias

## Nets (pads, with @x,y where several pads share a name; then routed paths per layer and width w, separated by ;. In a path a pad name is that pad's centre, name@x,y a point inside that pad or via, vN(x,y) a via of type N, cw(c..) or ccw(c..) an arc to the next point about the centre after c; other vN are vias at no path point)
3V3: C1.1 C2.1 C6.1 C7.1 C11.1 C12.1 C13.1 C14.1 C15.1 C17.1 C18.1 C21.1 C23.2 C24.2 J1.1 J2.1 J3.1 J4.1 R3.2 R4.2 SW1.2 U1.1 U1.8 U1.20 U1.23 U1.34 U1.35 U1.40 U1.48 U2.3 U4.5 | length 44.2
  L1 w0.242: 28.931,19.668 U1.40@29.489,19.668 ; 28.981,15.665 U1.48 ; U1.1@30.137,14.76 U1.1@30.143,14.76 ; U1.1@30.143,14.76 U1.1 ; 30.643,22.367 U1.35 U1.34 ; U1.23@36.559,20.665 36.819,20.665 37.219,21.065 C1.1 ; v1@40.157,4.013 v1@40.193,4.049 ; J3.1@40.175,6.059 J3.1
  L1 w0.254: C6.1 U2.3@12.439,2.993 ; C14.1 U1.1@30.137,14.76 ; U1.8 33.643,13.601 34.442,12.802 ; U1.20 37.497,19.165 C15.1 ; C1.1 C2.1 39.336,21.065 39.734,21.463 39.734,21.919 v2(39.751,21.936)
  L1 w0.35: C23.2 C24.2
  L1 w0.353: v1(11.589,1.33) C6.1 ; v1(27.127,18.542) 27.108,18.561 27.108,19.234 C21.1 28.067,19.253 28.481,19.668 28.931,19.668 ; v1@28.213,13.989 C14.1 ; v1(28.213,16.358) C13.1 28.981,15.665 ; v1(30.632,27.559) 30.638,27.554 30.638,26.548 C11.1 C18.1 C17.1 C12.1 30.643,22.367 ; v2(37.632,18.212) C15.1@37.632,19.03
  L1 w0.381: v1@11.386,6.958 v1@11.4,6.944 ; R3.2@11.4,5.931 R3.2@11.414,5.917 ; R3.2@11.439,5.931 v1@11.439,6.944 ; R4.2@14.222,6.603 v1(15.164,6.604) ; v1(20.737,19.878) 20.737,19.243 20.98,18.999 20.98,17.479 21.26,17.199 J4.1
  L1 w0.61: SW1.2@2.79,5.944 v1(3.545,5.944) ; U4.5@14.625,12.319 C7.1 v1(17.297,12.319) ; J1.1 20.483,6.074 20.483,3.814 v1(20.487,3.81) ; v1(30.293,3.785) J2.1 ; 34.442,12.802 34.442,12.342 C23.2@34.937,11.847 ; C24.2 v1(37.204,11.842) ; v1@40.193,4.049 J3.1@40.193,6.059
  other v1: 40.193,4.013 11.439,6.958 28.213,13.945
BOOT: C16.1 R8.2 R9.2 U1.4 | length 33.6
  L1 w0.242: 31.643,14.356 U1.4
  L1 w0.35: C16.1 R8.2 R9.2 6.661,9.652 27.686,9.652 28.168,9.17 31.111,9.17 31.643,9.702 31.643,14.356
CC1: J6.A5 R7.1 | length 1.7
  L1 w0.3: J6.A5 R7.1
CC2: J6.B5 R6.1 | length 1.7
  L1 w0.3: J6.B5@7.231,19.713 7.72,19.713 7.722,19.71 R6.1
  L1 w0.35: R6.1@8.922,19.534 R6.1@8.923,19.533
D_N: J6.A7 J6.B7 U3.1 | length 7.2
  L1 w0.35: J6.B7@7.224,22.213 8.075,22.213 8.28,22.008 8.28,21.414 8.079,21.213 ; J6.A7 8.079,21.213 ; U3.1 10.689,21.88 10.022,21.213 8.079,21.213
D_P: J6.A6 J6.B6 U3.3 | length 8.1
  L1 w0.35: J6.A6 6.377,21.713 6.172,21.508 6.172,20.918 6.377,20.713 J6.B6 9.995,20.713 10.728,19.98 U3.3
DATA_N: U1.37 U3.6 | length 15.2
  L1 w0.35: U3.6 14.72,21.796 15.495,21.796 16.006,21.285 28.702,21.285 28.822,21.165 U1.37
DATA_P: U1.38 U3.4 | length 15.1
  L1 w0.35: U3.4 15.411,19.98 16.006,20.575 28.702,20.575 28.792,20.665 U1.38
ESD_RX: D1.K J3.3 R2.2 | length 4.8
  L1 w0.35: J3.3 D1.K R2.2
ESD_TX: D2.K J3.2 R1.2 | length 4.2
  L1 w0.35: J3.2 D2.K R1.2
GND: C1.2 C2.2 C3.1 C4.1 C5.1 C6.2 C7.2 C8.2 C9.2 C10.2 C11.2 C12.2 C13.2 C14.2 C15.2 C16.2 C17.2 C18.2 C19.1 C20.1 C21.2 C22.2 C23.1 C24.1 D1.A D2.A J1.4 J1.5 J1.6 J2.4 J2.5 J2.6 J3.4 J3.5 J3.6 J4.5 J5.2 J5.4 J6.A1B12 J6.B1A12 pad.0 pad.1 R5.2 R6.2 R7.2 R9.1 T1.2 T1.4 U1.22 U1.32 U1.49 U2.4 U3.2 U4.2 X2.2 X2.4 | length 68.2
  L1 w0.242: U1.49@32.143,19.545 U1.32
  L1 w0.254: J4.5 21.26,14.479 21.895,13.844 v1(21.895,12.299) ; U1.49@34.95,20.371 U1.49@35.156,20.165 ; U1.22 37.517,20.165 C1.2 C2.2 38.675,20.292 39.719,20.292 40.255,20.828 v2(40.361,20.828) ; v1(45.136,18.644) T1.2 ; T1.4 v1(45.136,20.752)
  L1 w0.353: v1(5.559,8.687) R9.1 ; J6.A1B12@7.229,24.663 7.241,24.65 v1@8.243,24.65 ; J6.B1A12@7.275,18.263 7.504,18.263 8.546,17.221 v1(8.585,17.221) ; C16.2 v1@8.62,12.111 ; R6.2 9.927,19.706 9.927,18.648 v1(9.931,18.644) ; R7.2@9.923,22.733 v1(10.77,22.733) ; v1(11.065,15.392) C9.2@11.065,16.281 ; v1@11.097,20.913 v1@11.105,20.921 ; v1@11.105,20.93 U3.2@12.127,20.93 ; v1@11.166,18.431 C8.2@12.063,18.431 ; U3.2@12.127,20.921 U3.2 ; U2.4 C6.2 13.244,1.326 15.464,1.326 v1(15.469,1.321) ; v1@13.675,13.466 U4.2@13.675,14.504 ; v1@13.767,13.462 v1@13.77,13.466 ; C7.2@16.027,13.564 v1(16.027,14.478) ; C10.2 v1(17.094,16.281) ; v1(16.561,10.917) C5.1 ; C5.1@17.399,10.871 C5.1@17.432,10.905 ; v1(26.264,18.517) 26.264,19.228 C21.2 ; v1(27.153,13.995) 27.153,14.089 27.329,14.266 27.329,14.676 C14.2 C13.2 C13.2@27.41,15.668 ; v1(28.346,24.257) C17.2 ; v1(28.372,26.518) 28.384,26.53 29.376,26.53 C11.2 ; v1(28.804,23.114) C12.2@29.826,23.114 ; v1(28.905,25.4) C18.2 ; v1(29.222,9.982) C20.1 ; v1(30.722,9.982) C19.1 ; v1(31.928,19.329) U1.49@32.143,19.545 ; U1.49@32.143,19.329 32.143,19.165 U1.49 32.918,18.415 U1.49@32.918,20.371 ; C22.2 33.91,23.228 34.912,23.228 v1(34.925,23.216) ; J2.4 J2.4@34.821,6.049 ; v1@34.821,3.813 v1@34.849,3.785 ; v1(35.48,2.277) J2.5 ; v1(36.678,23.139) X2.2 ; C15.2 39.192,18.27 v1(39.192,18.212) ; X2.4 X2.4@38.844,24.539 ; X2.4@38.844,24.489 v1@40.1,24.489 ; v1@40.1,24.539 v1@40.149,24.589 ; v1(40.361,17.513) C3.1 ; D2.A v1(40.693,9.779) ; v1(43.358,17.577) C4.1 ; D1.A v1(44.193,9.728) ; v1(48.946,17.247) J5.4 ; J5.2 48.997,21.191 v1(48.997,21.946)
  L1 w0.381: v1(34.982,9.742) C23.1 ; C24.1 v1(37.534,10.842) ; R5.2 38.985,14.736 38.985,13.847 v1(38.989,13.843)
  L1 w0.61: J1.6 v1(19.681,2.277) ; v1(24.979,3.81) J1.4@24.979,6.585 ; v1(25.726,2.277) J1.5 ; J2.6 v1(29.536,2.277) ; v1@34.793,3.813 J2.4@34.793,6.049 ; J3.6 v1(39.472,2.277) ; v1(44.693,4.369) J3.4@44.693,6.585 ; v1(45.466,2.277) J3.5
  other v1: 8.987,1.867 16.51,1.867 22.733,2.277 32.461,2.277 42.621,2.277 34.793,3.785 6.487,4.367 8.987,4.367 16.51,4.367 49.713,5.633 17.78,6.388 6.487,6.867 8.987,6.867 49.713,8.133 47.32,8.179 34.447,8.484 2.261,8.534 8.987,8.793 11.487,8.793 37.414,8.966 47.213,10.633 49.713,10.633 10.211,10.795 13.284,10.846 24.943,11.918 27.254,11.918 8.925,12.111 19.609,12.675 42.213,13.133 44.713,13.133 47.213,13.133 49.713,13.133 13.675,13.462 1.617,14.398 4.117,14.398 6.617,14.398 9.296,14.402 42.213,15.633 44.713,15.633 47.213,15.633 49.713,15.633 37.668,15.697 30.709,16.205 32.918,16.205 35.103,16.205 31.928,17.221 34.011,17.221 15.011,17.602 16.281,18.415 30.709,18.415 35.103,18.415 11.157,18.431 41.859,18.517 34.011,19.329 17.272,19.355 48.946,19.665 2.5,20 30.709,20.599 32.918,20.599 35.103,20.599 11.097,20.93 42.393,21.59 2.5,22.5 49.098,23.622 42.608,23.734 44.775,23.734 46.816,23.734 15.633,23.987 18.133,23.987 20.633,23.987 23.133,23.987 25.633,23.987 40.149,24.489 8.255,24.638 34.874,24.663 13.133,26.487 15.633,26.487 18.133,26.487 20.633,26.487 23.133,26.487 25.633,26.487 37.608,26.487 40.108,26.487 42.608,26.487 46.816,26.487 2.5,27.5 5,27.5
LED: D3.A U1.16 | length 1.7
  L1 w0.242: U1.16 36.881,17.165
  L1 w0.35: 36.881,17.165 D3.A
LSMPS: L2.1 L3.2 | length 2.4
  L1 w0.35: L2.1 31.643,25.806 L3.2
NetD3_K: D3.K R5.1 | length 1.4
  L1 w0.35: R5.1 D3.K
NetR8_1: R8.1 SW1.1 | length 3.3
  L1 w0.35: SW1.1 R8.1
NREST: C5.2 J4.3 U1.7 | length 29.3
  L1 w0.242: 33.143,14.356 U1.7
  L1 w0.35: v1@19.383,10.894 v1@19.406,10.871 ; v1(19.406,10.917) C5.2 18.479,13.297 17.704,14.072 17.704,15.9 18.542,16.739 20.32,16.739 J4.3 ; 33.143,14.356 33.146,14.353 33.146,12.885 33.757,12.274 v1(33.757,10.922)
  L4 w0.35: v1(19.406,10.917) 19.408,10.92 v1@33.754,10.92
Pi_filter: C9.1 C10.1 FB1.2 U4.1 U4.3 | length 6.4
  L1 w0.35: C9.1 12.725,16.281 ; U4.3@12.725,14.656 12.725,16.281 ; U4.1@14.6,14.656 14.6,16.281 ; C10.1 14.6,16.281 ; 12.725,16.281 13.545,16.281 14.6,16.281
RF1: C3.2 L1.1 U1.21 | length 5.2
  L1 w0.35: U1.21 36.926,19.665 C3.2 L1.1
RF_IN: C4.2 L1.2 T1.1 | length 2.3
  L1 w0.35: L1.2 C4.2 T1.1
RF_OUT: J5.1 T1.3 | length 1.7
  L1 w0.35: T1.3 J5.1
SHT_SCL: J1.2 J2.2 R3.1 U1.5 U2.2 | length 35.1
  L1 w0.242: 32.143,14.356 U1.5
  L1 w0.35: U2.2@12.439,4.393 R3.1 12.439,7.595 13.365,8.521 22.584,8.521 ; J1.2 21.979,7.917 22.584,8.521 ; J2.2 31.793,8.171 32.143,8.521 ; 32.143,14.356 32.143,8.521 ; 22.584,8.521 32.143,8.521
SHT_SDA: J1.3 J2.3 R4.1 U1.6 U2.1 | length 40.4
  L1 w0.242: 32.643,14.356 U1.6
  L1 w0.35: U2.1 13.239,7.415 13.444,7.62 v1(17.78,7.62) ; v1(23.479,3.81) J1.3 J1.3@23.479,6.585 ; 32.643,14.356 32.643,10.562 33.293,9.913 v1(33.293,8.484) J2.3
  L4 w0.35: v1(17.78,7.62) 19.761,7.62 20.625,8.484 24.486,8.484 ; v1@23.479,4.064 23.479,7.477 24.486,8.484 ; v1@33.249,8.484 24.486,8.484
SWCLK: J4.4 U1.41 | length 8.4
  L1 w0.242: 28.675,18.915 28.925,19.165 U1.41
  L1 w0.35: J4.4 23.495,16.764 25.552,16.764 26.543,17.755 27.515,17.755 28.675,18.915
SWDO: J4.2 U1.39 | length 9.4
  L1 w0.2: J4.2 22.53,17.207 22.86,17.537 22.86,19.456 23.292,19.888 27.965,19.888 28.194,20.117 28.931,20.117 28.979,20.165 U1.39
SWO: J4.6 U1.43 | length 10.6
  L1 w0.242: 28.931,18.161 28.935,18.165 U1.43
  L1 w0.35: J4.6 22.627,14.431 22.983,14.431 23.952,13.462 25.603,13.462 26.264,14.122 26.264,16.332 27,17.069 27.838,17.069 28.931,18.161
UART_RX: R2.1 U1.12 | length 9.4
  L1 w0.242: 35.643,14.383 U1.12
  L1 w0.34: 35.643,14.383 35.643,14.105 35.967,13.781 37.705,13.781
  L1 w0.35: 37.705,13.781 39.592,11.894 R2.1
UART_TX: R1.1 U1.11 | length 8.9
  L1 w0.242: 35.143,14.377 U1.11
  L1 w0.35: 35.143,14.377 35.143,13.642 35.675,13.11 37.436,13.11 39.302,11.244 R1.1
VDDUSB: C8.1 FB1.1 J6.A4B9 J6.B4A9 U3.5 | length 20.4
  L1 w0.353: J6.B4A9@7.105,19.187 J6.B4A9@7.229,19.063 ; J6.A4B9@7.105,23.739 7.235,23.869 12.705,23.869 13.42,23.154 13.42,20.93 ; J6.B4A9@7.257,19.035 8.176,19.035 9.58,17.631 C8.1 FB1.1 13.42,17.674 13.42,20.93 ; U3.5 13.42,20.93
VFBSMPS: C22.1 L3.1 U1.31 | length 5
  L1 w0.242: U1.31@32.639,21.82 32.639,22.327
  L1 w0.35: 32.639,22.327 32.639,23.237 C22.1 32.643,24.528 33.848,25.734 33.848,25.737 34.172,26.06 L3.1
VLXSMPS: L2.2 U1.33 | length 1.1
  L1 w0.242: U1.33 31.643,22.301
  L1 w0.35: 31.643,22.301 L2.2
XH1: U1.25 X2.1 | length 4.1
  L1 w0.35: U1.25@35.643,22.033 35.643,23.73 36.402,24.489 X2.1
XH2: U1.24 X2.3 | length 3.8
  L1 w0.35: U1.24 36.557,21.165 37.414,22.022 38.468,22.022 38.794,22.349 X2.3
XL1: C19.2 U1.3 X1.1 | length 3.5
  L1 w0.242: 31.143,14.345 U1.3
  L1 w0.35: C19.2 30.722,13.079 31.143,13.5 31.143,14.345
XL2: C20.2 U1.2 X1.2 | length 4.4
  L1 w0.242: 30.643,14.527 U1.2
  L1 w0.35: C20.2 X1.2 29.493,13.225 29.493,13.883 29.698,14.088 30.438,14.088 30.643,14.293 30.643,14.527
pads on no net: J4.MH J6.A8 J6.B8 J6.MH J6.SH U1.9 U1.10 U1.13 U1.14 U1.15 U1.17 U1.18 U1.19 U1.26 U1.27 U1.28 U1.29 U1.30 U1.36 U1.42 U1.44 U1.45 U1.46 U1.47 U4.4

## Polygon pours and split planes (outlines as drawn)
GND on L1 "GND_L01_P016" (solid, remove dead copper, pour order 16): 1.27,0.118 cw(c1.27,1.388) 0,1.388 0,27.178 cw(c1.27,27.178) 1.27,28.448 50.546,28.448 cw(c50.546,27.178) 51.816,27.178 51.816,1.388 cw(c50.546,1.388) 50.546,0.118
3V3 on L1 "3V3_L01_P015" (solid, pour order 15): 14.262,12.824 17.427,12.824 17.665,12.586 17.665,11.956 17.405,11.696 14.332,11.696 14.234,11.794 14.234,12.796
3V3 on L1 "3V3_L01_P014" (solid, pour order 14): 26.824,19.508 26.827,19.511 28.076,19.511 28.154,19.589 28.391,19.352 28.391,19.329 28.383,19.329 28.061,19.007 27.539,19.007 27.475,18.943 27.475,18.383 27.285,18.193 26.883,18.193 26.778,18.298 26.778,18.94 26.827,18.989
3V3 on L1 "3V3_L01_P013" (solid, pour order 13): 36.957,19.06 37.303,18.714 37.303,17.995 37.426,17.872 37.826,17.872 37.968,18.014 37.968,18.647 37.883,18.732 37.883,19.299 37.009,19.299 36.99,19.28
3V3 on L1 "3V3_L01_P012" (solid, pour order 12): 39.419,22.191 39.53,22.302 39.957,22.302 40.098,22.161 40.098,21.528 39.375,20.805 38.896,20.805 36.985,20.805 36.888,20.902 37.324,21.338 39.269,21.338 39.416,21.485 39.419,21.485
3V3 on L1 "3V3_L01_P011" (solid, pour order 11): 33.516,13.309 34.176,12.649 34.747,12.649 34.747,13.069 33.77,14.046 33.77,14.249 33.516,14.249
3V3 on L1 "3V3_L01_P008" (solid, pour order 8): 30.048,15.037 27.965,15.037 27.94,15.011 27.94,14.199 27.838,14.097 27.838,13.741 28.016,13.564 28.372,13.564 28.575,13.767 28.575,14.376 28.829,14.63 30.048,14.63
VFBSMPS on L1 "VFBSMPS_L01_P010" (solid, pour order 10): 32.461,22.53 32.258,22.733 32.258,24.486 33.63,25.857 33.63,26.594 33.68,26.645 34.874,26.645 34.95,26.568 34.95,25.552 34.823,25.425 34.011,25.425 33.02,24.435 33.02,22.733 32.817,22.53
3V3 on L1 "3V3_L01_P009" (solid, pour order 9): 31.217,21.412 31.267,21.463 31.267,22.174 31.166,22.276 31.013,22.276 30.937,22.352 30.937,22.885 30.937,23.749 31.09,23.901 31.09,27.813 30.988,27.915 30.353,27.915 30.251,27.813 30.251,23.851 30.378,23.724 30.378,22.377 30.505,22.25 30.505,21.463 30.556,21.412
3V3 on L1 "3V3_L01_P007" (solid, pour order 7): 28.987,15.824 28.702,15.824 28.575,15.951 28.575,16.637 28.499,16.713 27.94,16.713 27.864,16.637 27.864,15.392 28.499,15.392 28.6,15.494 28.963,15.494
GND on L2 "GND_L02_P000" (solid, pour order 0): 1.27,0.118 cw(c1.27,1.388) 0,1.388 0,27.178 cw(c1.27,27.178) 1.27,28.448 50.546,28.448 cw(c50.546,27.178) 51.816,27.178 51.816,1.388 cw(c50.546,1.388) 50.546,0.118
GND on L3 "GND_L03_P003" (solid, pour order 3): 1.27,0.118 cw(c1.27,1.388) 0,1.388 0,27.178 cw(c1.27,27.178) 1.27,28.448 50.546,28.448 cw(c50.546,27.178) 51.816,27.178 51.816,1.388 cw(c50.546,1.388) 50.546,0.118
3V3 on L4 "3V3_L04_P005" (solid, pour order 5): 1.27,0.118 cw(c1.27,1.388) 0,1.388 0,27.178 cw(c1.27,27.178) 1.27,28.448 50.546,28.448 cw(c50.546,27.178) 51.816,27.178 51.816,1.388 cw(c50.546,1.388) 50.546,0.118

## Keep-outs
Keep-Out Layer:
  lines w0.254: 0,1.388 ccw(c1.27,1.388) 1.27,0.118 50.546,0.118 ccw(c50.546,1.388) 51.816,1.388 ; 0,1.397 0,27.178 cw(c1.27,27.178) 1.27,28.448 50.546,28.448 cw(c50.546,27.178) 51.816,27.178 51.816,1.397
  lines w0.381: 10.991,4.127 cw(c11.906,4.127) 11.906,5.041 ; 10.991,4.128 10.991,2.997 ccw(c11.906,2.997) 11.906,2.083 ; 13.786,2.083 ccw(c13.786,2.997) 14.7,2.997 14.7,4.128 ; 13.786,5.041 cw(c13.786,4.127) 14.7,4.127

## Other copper
L1:
  pour cut-out: 47.473,20.32 47.473,19.025 38.964,19.025 38.964,20.32

## Silkscreen, mask and mechanical layers (free items; w line width, h text height)
Top Overlay:
  drawing of 88 lines, arcs and shapes, not listed
  text "USB-C" at 1.118,26.594 h2
  text "SWD" at 19.837,20.752 h2
  text "BLE" at 47.293,15.924 h2
  text "RST" at 1.118,12.7 h2
  text "3V3" at 20.888,10.317 h0.76 r90
  text "SCL" at 22.393,10.317 h0.76 r90
  text "SDA" at 23.893,10.317 h0.76 r90
  text "GND" at 25.393,10.317 h0.76 r90
  text "3V3" at 47.476,10.136 h0.76 r90
  text "TX" at 48.728,10.136 h0.76 r90
  text "RX" at 49.98,10.136 h0.76 r90
  text "GND" at 51.232,10.136 h0.76 r90
  text "T&H" at 10.984,8.198 h2
  text "I2C-S1" at 19.976,8.204 h2
  text "I2C-S2" at 29.79,8.204 h2
  text "UART" at 46.584,8.204 h2
Bottom Overlay:
  drawing of 78 lines, arcs and shapes, not listed

## Dimensions
50.546,28.448 to 50.546,0.118 on Mechanical 1
0,27.178 to 51.816,27.178 on Mechanical 1

## Text inside footprints (layer, text, board x,y; h text height)
D3: Top 3D Body "+" at 36.598,17.673 h0.5